# EAGLE board sdr_3157 (EAGLE 9.6.2)
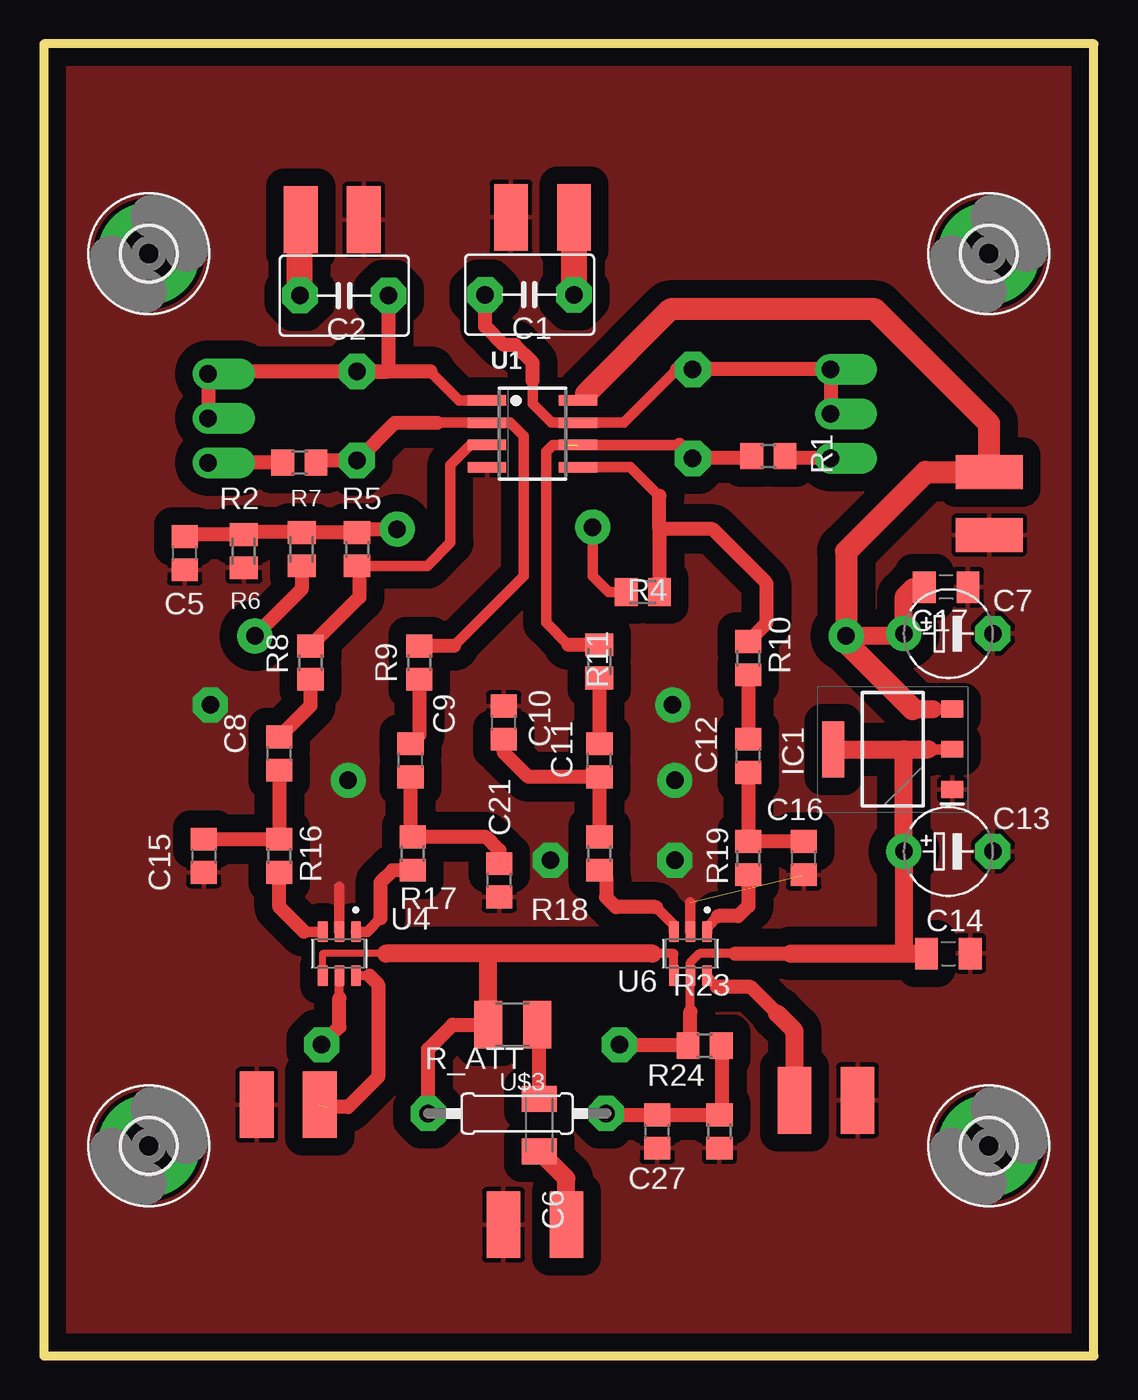
[diagram p0: board, top side]
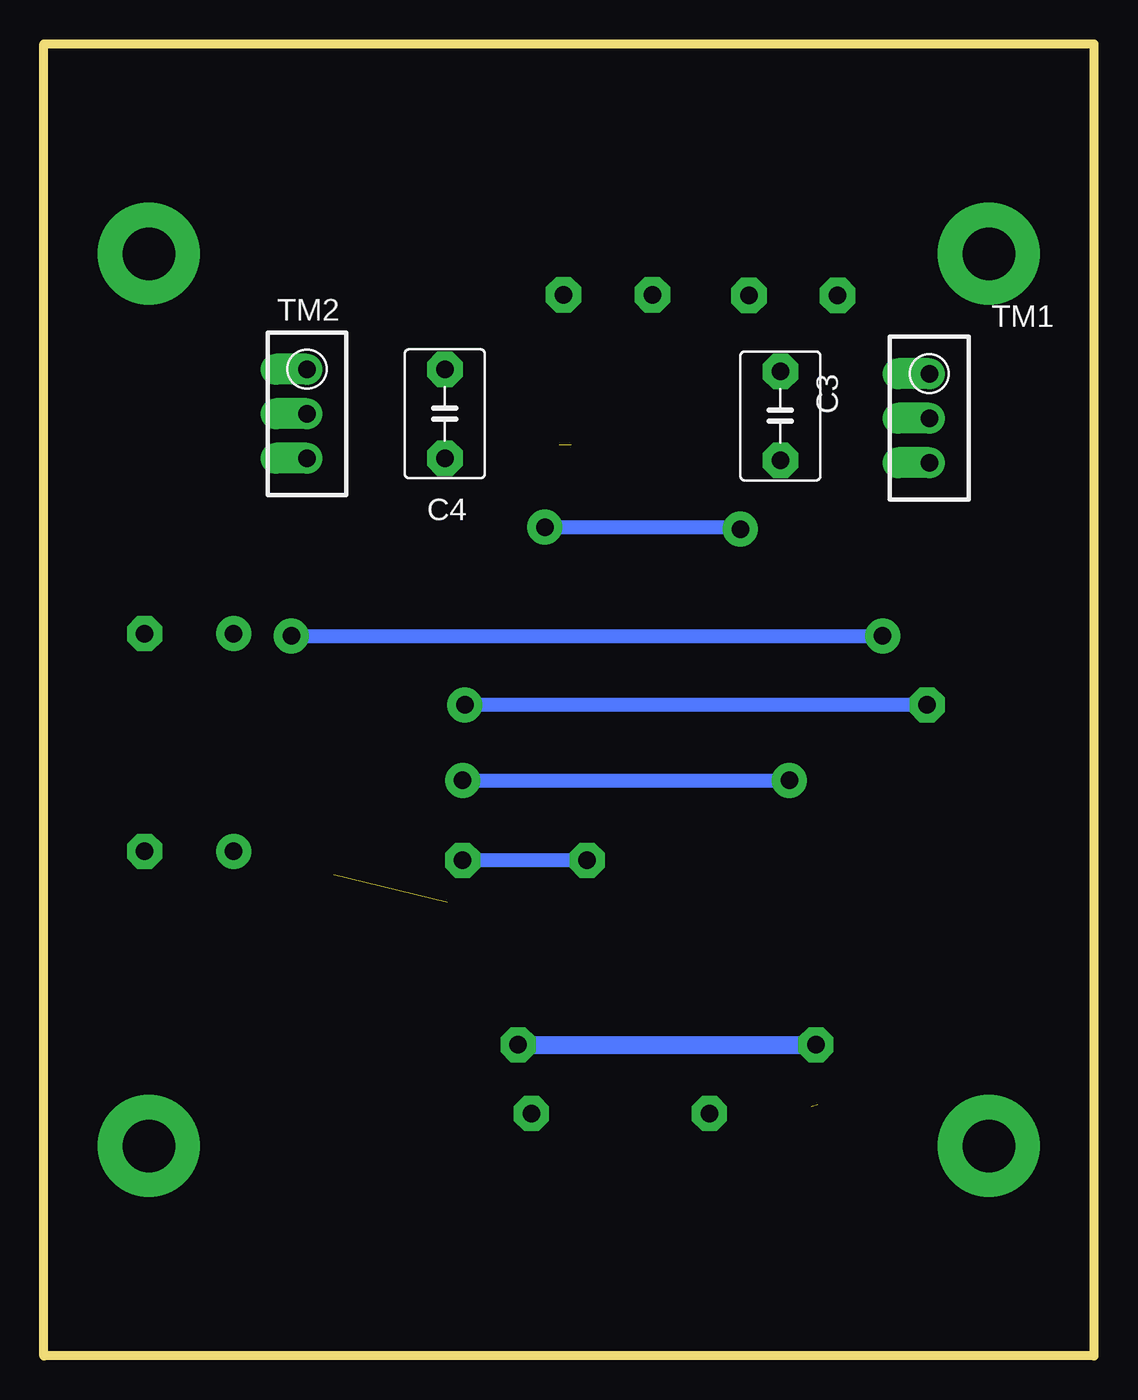
[diagram p1: board, bottom side, seen from below]

Size 60 x 75 mm. Coordinates in mm from the lower left corner, seen from the top.
Outline: 0,0 60,0 60,75 0,75 0,0
Copper layers (1*16): Top 0.035mm / dielectric 1.5mm / Bottom 0.035mm
Design rules "default": minimum track width 6mil, minimum drill 0.35mm, track to track 6mil, track to pad 6mil, pad to pad 6mil, via to via 6mil, smd to smd 6mil, copper to edge 40mil, drill to drill 6mil, minimum pad ring 10mil, minimum via ring 8mil, stop-mask expansion 4mil, vias tented up to drill 0mil, thermal gap 10mil

## Footprints (pad centres in the part's own frame; a part is rotated, then mirrored left to right if it is on the bottom)
C050-045X075 = drill 1 pad 2.032 octagon: 1 -2.54,0; 2 2.54,0
C0805 = smd 1.3 x 1.5: 1 -0.95,0; 2 0.95,0
C1206K = smd 1.5 x 2: 1 -1.5,0; 2 1.5,0
E5-5 = drill 1 pad 2: + -2.54,0 | drill 1 pad 2 octagon: - 2.54,0
C0805' = smd 1.3 x 1.8: 1 -1.25,0; 2 1.25,0
2XSMD_PIN = smd 3.81 x 1.93: P$1 0,1.8; P$2 0,-1.8
3,0-PAD = drill 3 pad 5.842: B3,0 0,0
SOT230P700X180-4N = smd 1.25 x 0.95: 1 -3.4,2.3; 2 -3.4,0; 3 -3.4,-2.3 | smd 1.25 x 3.2: 4 3.4,0
R0805 = smd 1.3 x 1.5: 1 -0.95,0; 2 0.95,0
M0805 = smd 1.3 x 1.6: 1 -0.95,0; 2 0.95,0
R1210 = smd 1.6 x 2.7: 1 -1.4,0; 2 1.4,0
RTRIM3296W = drill 1 pad 1.778 offset: 1 0,-2.54; 2 0,0; 3 0,2.54
SO08 = smd 0.6 x 2.2: 1 -1.905,-2.6; 2 -0.635,-2.6; 3 0.635,-2.6; 4 1.905,-2.6; 5 1.905,2.6; 6 0.635,2.6; 7 -0.635,2.6; 8 -1.905,2.6
SOT95P280X145-6N = smd 1.21 x 0.58: 1 -1.255,0.95; 2 -1.255,0; 3 -1.255,-0.95; 4 1.255,-0.95; 5 1.255,0; 6 1.255,0.95
0207/10 = drill 1 pad 2 octagon: 1 -5.08,0; 2 5.08,0

## Placement (x,y rotation side)
C1  1uF  [C050-045X075]  27.76,60.66 180 top
C2  1uF  [C050-045X075]  17.17,60.6 180 top
C3  200pF  [C050-045X075]  17.91,53.72 90 bottom
C4  200pF  [C050-045X075]  37.08,53.85 90 bottom
C5  10uF  [C0805]  8.05,45.87 90 top
C6  22nF  [C1206K]  28.32,13.18 270 top
C7  [E5-5]  51.69,41.27 0 top
C8  1uF  [C0805]  13.46,34.42 90 top
C9  1uF  [C0805]  20.95,34.04 90 top
C10  22nF  [C0805]  26.29,36.2 90 top
C11  1uF  [C0805]  31.75,34.04 90 top
C12  1uF  [C0805]  40.26,34.29 90 top
C13  [E5-5]  51.69,28.83 0 top
C14  [C0805']  51.69,22.99 0 top
C15  22nF  [C0805]  9.14,28.57 270 top
C16  22nF  [C0805]  43.43,28.45 90 top
C17  [C0805']  51.56,43.94 180 top
C21  22nF  [C0805]  26.04,27.18 90 top
C27  1uF  [C0805]  35.05,12.83 90 top
COS  [2XSMD_PIN]  13.97,14.35 90 top
H1  MOUNT-PAD-ROUND3.0  [3,0-PAD]  6,12 0 top
H2  MOUNT-PAD-ROUND3.0  [3,0-PAD]  54,12 0 top
H3  MOUNT-PAD-ROUND3.0  [3,0-PAD]  6,63 0 top
H4  MOUNT-PAD-ROUND3.0  [3,0-PAD]  54,63 0 top
I  [2XSMD_PIN]  28.5,65.07 90 top
IC1  LM1117-33  [SOT230P700X180-4N]  48.51,34.67 180 top
Q  [2XSMD_PIN]  16.48,64.95 90 top
R1  7k5  [R0805]  41.4,51.44 0 top
R2  7k5  [R0805]  14.61,51.05 180 top
R4  10k  [M0805]  34.24,43.66 0 top
R5  10k  [R0805]  17.91,46.1 270 top
R6  1k  [M0805]  11.43,46 90 top
R7  1k  [M0805]  14.73,46.1 90 top
R8  1k  [R0805]  15.24,39.62 90 top
R9  1k  [R0805]  21.46,39.62 90 top
R10  1k  [R0805]  40.26,39.88 90 top
R11  1k  [M0805]  31.75,39.69 90 top
R16  20  [R0805]  13.46,28.57 90 top
R17  20  [R0805]  21.08,28.7 90 top
R18  20  [R0805]  31.75,28.7 90 top
R19  20  [R0805]  40.26,28.45 90 top
R23  1k  [R0805]  38.61,12.83 90 top
R24  1k  [R0805]  37.77,17.73 0 top
R_ATT  20  [R1210]  26.8,18.92 180 top
RF_IN  [2XSMD_PIN]  28.07,7.49 90 top
RF_IN1  [2XSMD_PIN]  54.03,48.72 180 top
SIN  [2XSMD_PIN]  44.7,14.61 270 top
TM1  5k  [RTRIM3296W]  9.4,53.59 180 bottom
TM2  5k  [RTRIM3296W]  44.96,53.85 180 bottom
U1  NE5532D  [SO08]  27.94,52.7 270 top
U4  SN74LVC1G3157DBVR  [SOT95P280X145-6N]  16.89,22.99 270 top
U6  SN74LVC1G3157DBVR  [SOT95P280X145-6N]  36.96,22.99 270 top
U$3  100uH  [0207/10]  27.05,13.84 180 top

## Library data of the parts
C1-C6 C8-C12 C15 C16 C21 C27 = rcl; SPICEPREFIX: C
C7 C13 C14 C17 COS I Q RF_IN RF_IN1 SIN = mylib
H1-H4 = holes
IC1 = LM1117MPX-33NOPB; ARROW_PART_NUMBER: LM1117MPX-33NOPB; ARROW_PRICE-STOCK: https://www.arrow.com/en/products/lm1117mpx-33nopb/on-semiconductor?region=nac; DESCRIPTION: LDO Voltage Regulators 800-mA 15-V linear voltage regulator 800-mA 15-V linear voltage regulator; HEIGHT: 1.8mm; MANUFACTURER_NAME: onsemi; MANUFACTURER_PART_NUMBER: LM1117MPX-33NOPB; MOUSER_PART_NUMBER: 863-LM1117MPX-33NOPB; MOUSER_PRICE-STOCK: https://www.mouser.co.uk/ProductDetail/onsemi/LM1117MPX-33NOPB?qs=DPoM0jnrROUIbzbQHFmeig%3D%3D
R1 R2 R4-R11 R16-R19 R23 R24 R_ATT = rcl; SPICEPREFIX: R
TM1 TM2 = rcl; SPICEMODEL: X; SPICEPREFIXL: POT
U1 = op-amp
U4 U6 = SN74LVC1G3157DBVR; AVAILABILITY: In Stock; DESCRIPTION: 5-V, 2:1 (SPDT), 1-channel general-purpose analog switch 6-SOT-23 -40 to 125; MF: Texas Instruments; MP: SN74LVC1G3157DBVR; PACKAGE: SOT-23-6 Texas Instruments; PRICE: None; PURCHASE-URL: https://pricing.snapeda.com/search/part/SN74LVC1G3157DBVR/?ref=eda
U$3 = rcl; SPICEPREFIX: L

## Nets
12V: C7.+ C17.2 IC1.3 R7.1 RF_IN1.P$2 U1.8
ANTENNA: R_ATT.2 U4.4 U6.4 U$3.2
COS_IN: COS.P$2 U4.6
GND: C5.1 C7.- C10.2 C13.- C14.2 C15.2 C16.1 C17.1 C21.1 C27.1 COS.P$1 H1.B3,0 H2.B3,0 H3.B3,0 H4.B3,0 I.P$1 IC1.1 Q.P$2 R6.1 R23.1 RF_IN1.P$1 RF_IN.P$1 SIN.P$1 U1.4 U4.2 U6.2
N$1: C6.2 RF_IN.P$2
N$2: C6.1 R_ATT.1
N$3: R16.1 U4.3
N$4: R17.1 U4.1
N$5: R18.1 U6.3
N$7: R19.1 U6.1
N$8: C8.1 C15.1 R16.2
N$9: C9.1 C21.2 R17.2
N$10: C10.1 C11.1 R18.2
N$11: C12.1 C16.2 R19.2
N$12: C8.2 R8.1
N$13: C9.2 R9.1
N$14: C11.2 R11.1
N$15: C12.2 R10.1
N$16: R5.2 R8.2 U1.3
N$17: C3.1 R2.1 R9.2 U1.2
N$18: R4.2 R10.2 U1.5
N$19: C4.1 R1.1 R11.2 U1.6
N$20: C5.2 R4.1 R5.1 R6.2 R7.2
N$21: C2.1 C3.2 TM1.1 TM1.2 U1.1
N$22: C2.2 Q.P$1
N$23: C1.1 I.P$2
N$24: C1.2 C4.2 TM2.1 TM2.2 U1.7
N$25: C27.2 R23.2 R24.2 U$3.1
N$28: R2.2 TM1.3
N$41: R1.2 TM2.3
SIN_IN: SIN.P$2 U6.6
VCC: C13.+ C14.1 IC1.2 IC1.4 R24.1 U4.5 U6.5

## Tracks (layer width: path | path; a pad name or v marks a point on that pad's centre or on a via)
12V  (via drill 1 pad 2)
  Top 0.61: 30.99,54.99 30.92,54.99 U1.8 | IC1.3 51.9,36.96 50.8,36.96
  Top 0.813: R7.1 14.73,43.81 v12.06,41.15
  Top 1.016: 50.8,36.96 49.66,36.96 49.64,36.97 | v45.85,41.15 49.02,41.15 C7.+ 49.15,43.43 49.66,43.94 C17.2
  Top 1.27: 30.99,54.99 35.81,59.82 47.5,59.82 54.03,53.29 RF_IN1.P$2 50.39,50.52 45.85,45.97 v45.85,41.15 45.85,40.77 49.64,36.97
  Bottom 0.813: v45.85,41.15 v12.06,41.15
ANTENNA
  Top 0.406: U4.4 15.94,22.99 19.56,22.99
  Top 0.508: U6.4 36.01,22.99 34.8,22.99
  Top 0.813: U$3.2 21.97,17.53 23.37,18.92 R_ATT.2
  Top 1.016: 34.8,22.99 25.4,22.99 | 25.4,22.99 19.56,22.99 | R_ATT.2 25.4,22.99
COS_IN  (1 unrouted)
  Top 0.508: U4.6 18.6,21.73
  Top 0.813: 18.6,21.73 19.11,21.22 19.11,15.94 17.4,14.22 16.13,14.22
GND  (via drill 1 pad 2)  (1 unrouted)
  Top 0.61: U6.2 36.96,25.91 | U4.2 16.89,26.8
  Bottom 0.813: v9.53,37.21 v35.94,37.21 | v28.96,28.32 v36.07,28.32 | v36.07,32.89 v17.4,32.89
  pour Top (isolate 1.016): -2.29,77.72 -2.29,-2.92 61.72,-2.92 61.72,77.72
N$1
  Top 0.508: 30.38,8.76 29.87,8.26 RF_IN.P$2
  Top 1.016: RF_IN.P$2 29.87,10.14 C6.2
N$2
  Top 0.813: C6.1 28.32,18.64 28.4,18.72
  Top 1.016: 28.4,18.72 R_ATT.1
N$3
  Top 0.61: U4.3 14.87,24.24
  Top 0.813: 14.87,24.24 13.46,25.65 R16.1
N$4
  Top 0.61: 19.24,25 18.48,24.24 U4.1
  Top 0.813: R17.1 19.94,27.75 19.24,27.05 19.24,25
N$5
  Top 0.61: R18.1 32.13,27.37 | U6.3 36.01,24.62 34.98,25.65
  Top 0.813: 32.13,27.37 32.13,26.21 32.69,25.65 34.98,25.65
N$7
  Top 0.61: U6.1 37.91,24.5 38.54,25.13
  Top 0.813: R19.1 40.26,25.7 39.69,25.13 38.54,25.13
N$8
  Top 0.813: C15.1 R16.2 C8.1
N$9
  Top 0.508: R17.2 20.95,29.78
  Top 0.813: C21.2 26.04,28.89 25.27,29.65 R17.2 | C9.1 20.95,29.78
N$10
  Top 0.813: R18.2 C11.1 27.69,33.09 26.29,34.48 C10.1
N$11
  Top 0.813: C12.1 R19.2 C16.2
N$12
  Top 0.813: R8.1 15.24,37.15 C8.2
N$13
  Top 0.813: R9.1 21.46,35.49 C9.2
N$14
  Top 0.813: R11.1 C11.2
N$15
  Top 0.813: R10.1 C12.2
N$16
  Top 0.61: R5.2 21.9,45.15 23.24,46.49 23.24,50.93 24.38,52.07 U1.3
  Top 0.813: R5.2 18.03,45.02 18.03,43.37 R8.2
N$17
  Top 0.61: 15.55,51.41 R2.1 15.68,51.18 | 22.48,53.34 U1.2 26.67,53.34 27.43,52.58 27.43,44.58 23.43,40.57 | 17.91,50.67 C3.1
  Top 0.813: 15.68,51.18 C3.1 20.07,53.34 22.48,53.34 | 23.43,40.57 R9.2
N$18
  Top 0.61: 35.18,49.15 33.53,50.8 U1.5 | 35.19,47.23 35.18,47.24
  Top 0.813: R10.2 41.27,41.84 41.27,44.2 38.23,47.24 35.18,47.24 35.18,49.15 | R4.2 35.19,47.23
N$19  (1 unrouted)
  Top 0.61: 29.97,40.64 28.7,41.91 28.7,51.69 29.08,52.07 29.84,52.07 | U1.6 36.32,52.07
  Top 0.813: R11.2 29.97,40.64 | 36.32,52.07 C4.1 40.33,51.31 R1.1
N$20  (via drill 1 pad 2)
  Top 0.61: R5.1 17.97,47.05 | R4.1 32.28,43.66 31.38,44.56 31.38,47.36
  Top 0.813: C5.2 8.18,46.95 R6.2 11.56,47.08 14.71,47.08 R7.2 R5.1 17.91,47.24 v20.19,47.24 | 31.38,47.36 v31.37,47.37
  Bottom 0.406: 20.32,47.37 v20.19,47.24
  Bottom 0.813: v31.37,47.37 20.32,47.37
N$21
  Top 0.61: U1.1 23.75,54.61 22.1,56.26
  Top 0.813: 22.1,56.26 C3.2 | C3.2 9.53,56.26 TM1.1 | TM1.1 TM1.2 | 9.42,56.13 TM1.1 | C3.2 19.68,56.26 19.68,60.58 C2.1
N$22
  Top 1.5: C2.2 14.63,64.89 Q.P$1
N$23
  Top 1.5: C1.1 I.P$2
N$24
  Top 0.61: 36.2,56.39 33.15,53.34 U1.7 29.03,53.34 27.94,54.43 27.94,55.75
  Top 0.813: C1.2 25.22,58.85 26.29,57.78 26.92,57.78 27.94,56.77 27.94,55.75 | 36.2,56.39 C4.2 TM2.1 TM2.2
N$25
  Top 0.813: U$3.1 32.2,13.78 C27.2 R23.2 38.73,13.9 38.73,17.71 R24.2
N$28
  Top 0.813: R2.2 TM1.3
N$41
  Top 0.61: R1.2 42.64,51.15
  Top 0.813: TM2.3 42.48,51.31 R1.2
SIN_IN
  Top 0.61: 38.48,21.08 37.91,21.66 U6.6
  Top 0.813: 41.91,19.56 40.39,21.08 38.48,21.08
  Top 1.016: SIN.P$2 42.9,18.56 41.91,19.56
VCC  (via drill 1 pad 2)
  Top 0.406: v32.89,17.78 36.96,17.78
  Top 0.508: 16.89,20.45 U4.5 | 39.5,22.99 37.47,22.99 36.96,22.48 U6.5 36.96,19.68
  Top 0.61: 50.55,34.67 IC1.2
  Top 0.813: v32.89,17.78 32.94,17.73 R24.1 36.96,17.87 36.96,19.68 | 39.5,22.99 42.67,22.99 | v15.88,17.78 16.89,18.8 16.89,20.45
  Top 1.016: 42.67,22.99 49.15,22.99 | 49.15,22.99 C14.1 | 49.15,22.99 C13.+ 49.15,34.67 | IC1.4 49.15,34.67 | 49.15,34.67 50.55,34.67
  Bottom 1.016: v32.89,17.78 v15.88,17.78